# Altium PCB IMU_Breakout.PcbDoc
Units mm, origin at the board's own origin, x right, y up, seen from the top; angles counter-clockwise.
Board outline 95.12 x 95.12 mm, 2 copper layers (Top Layer, Bottom Layer); 8 components, 6 nets, 44 pads, 18 vias.
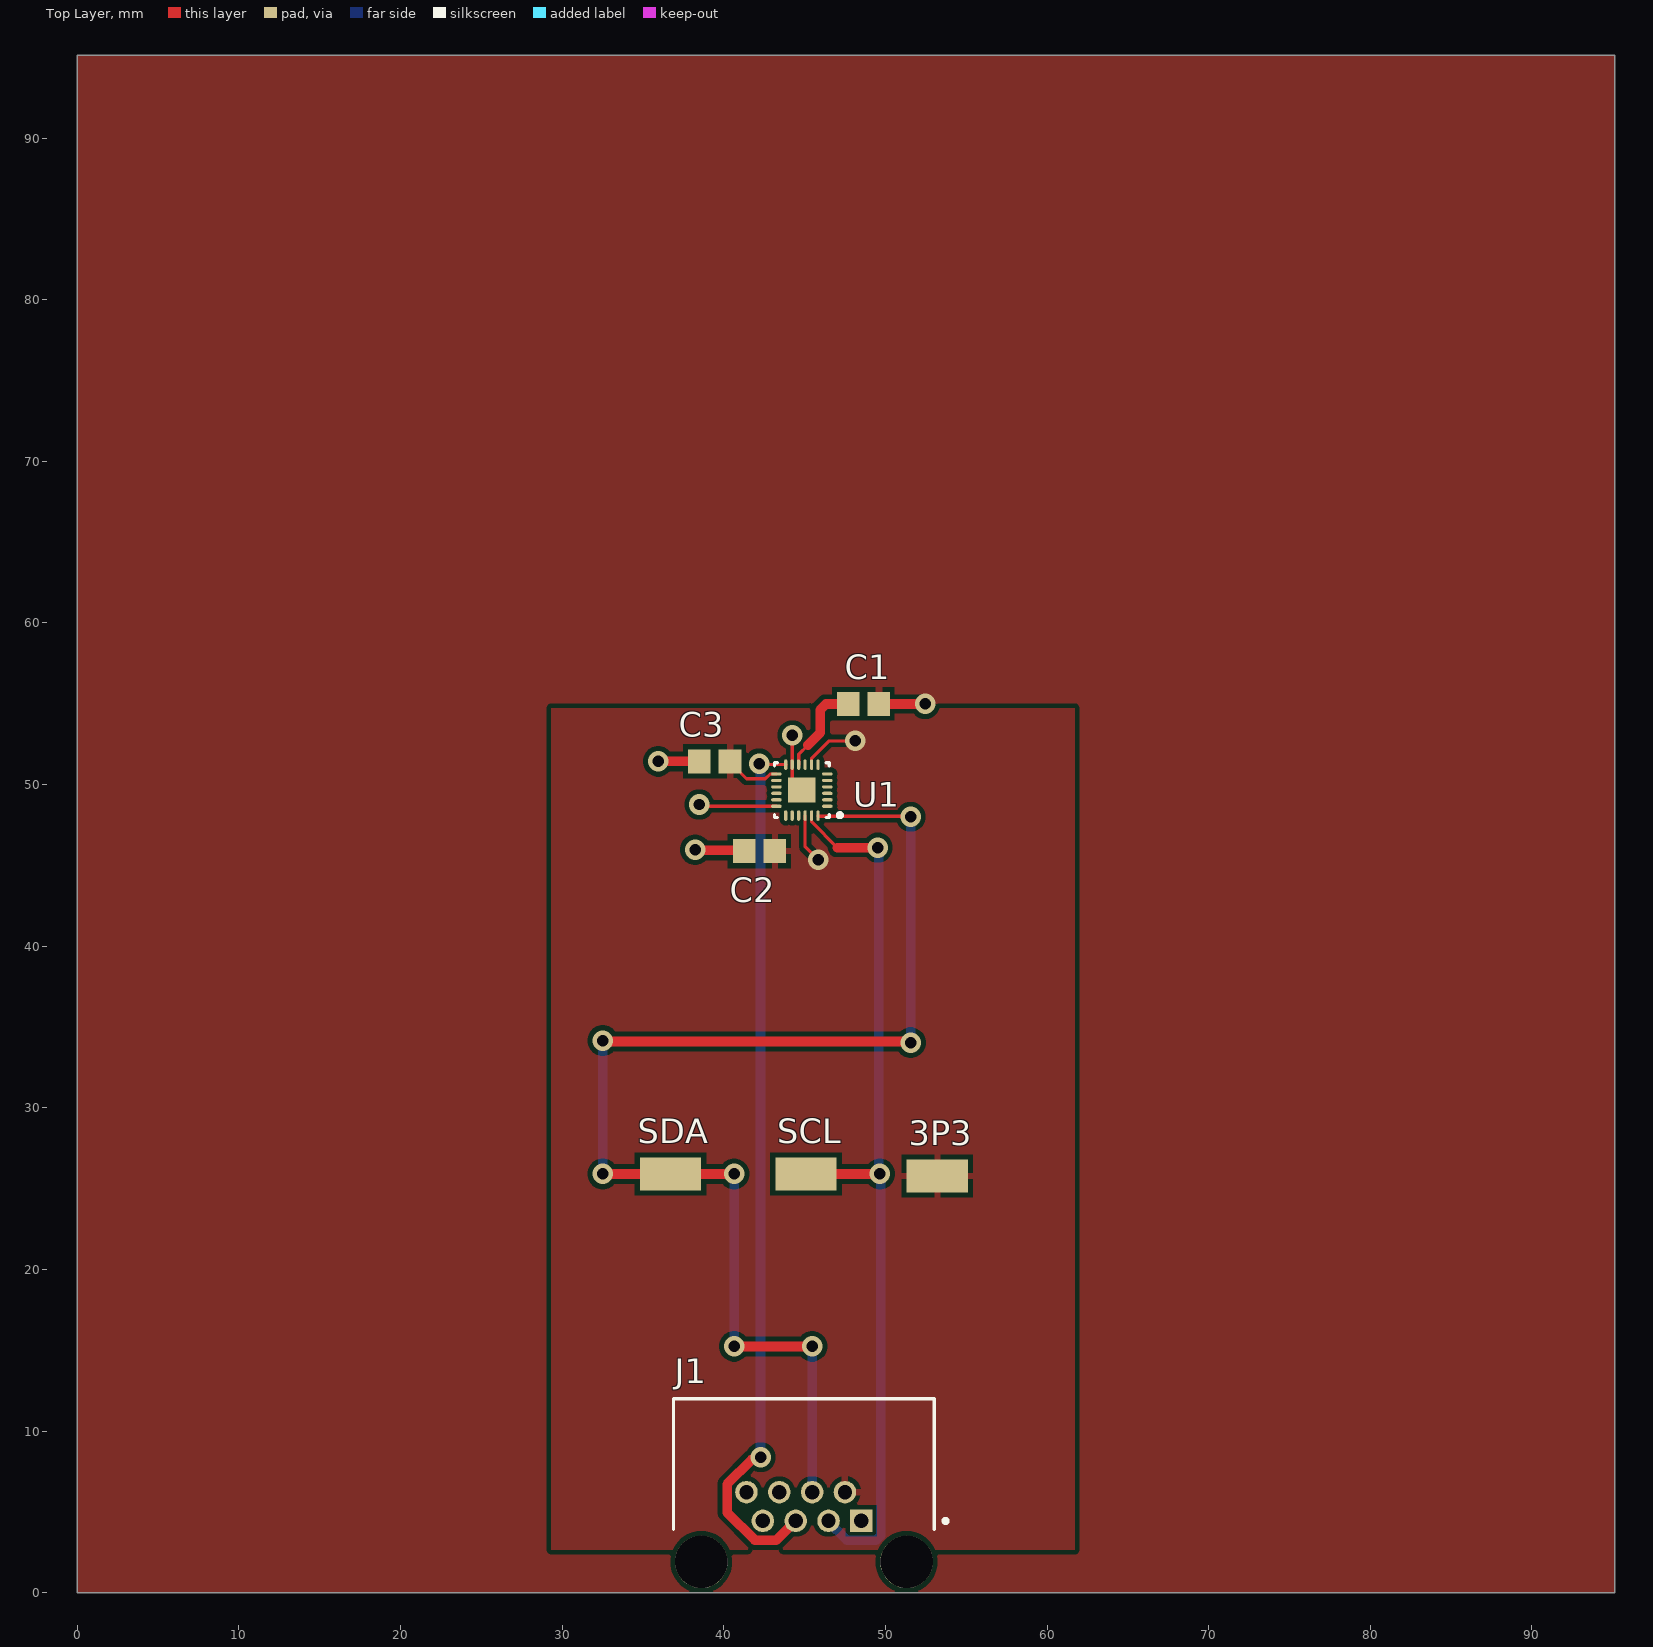
[diagram p0: Top Layer view]
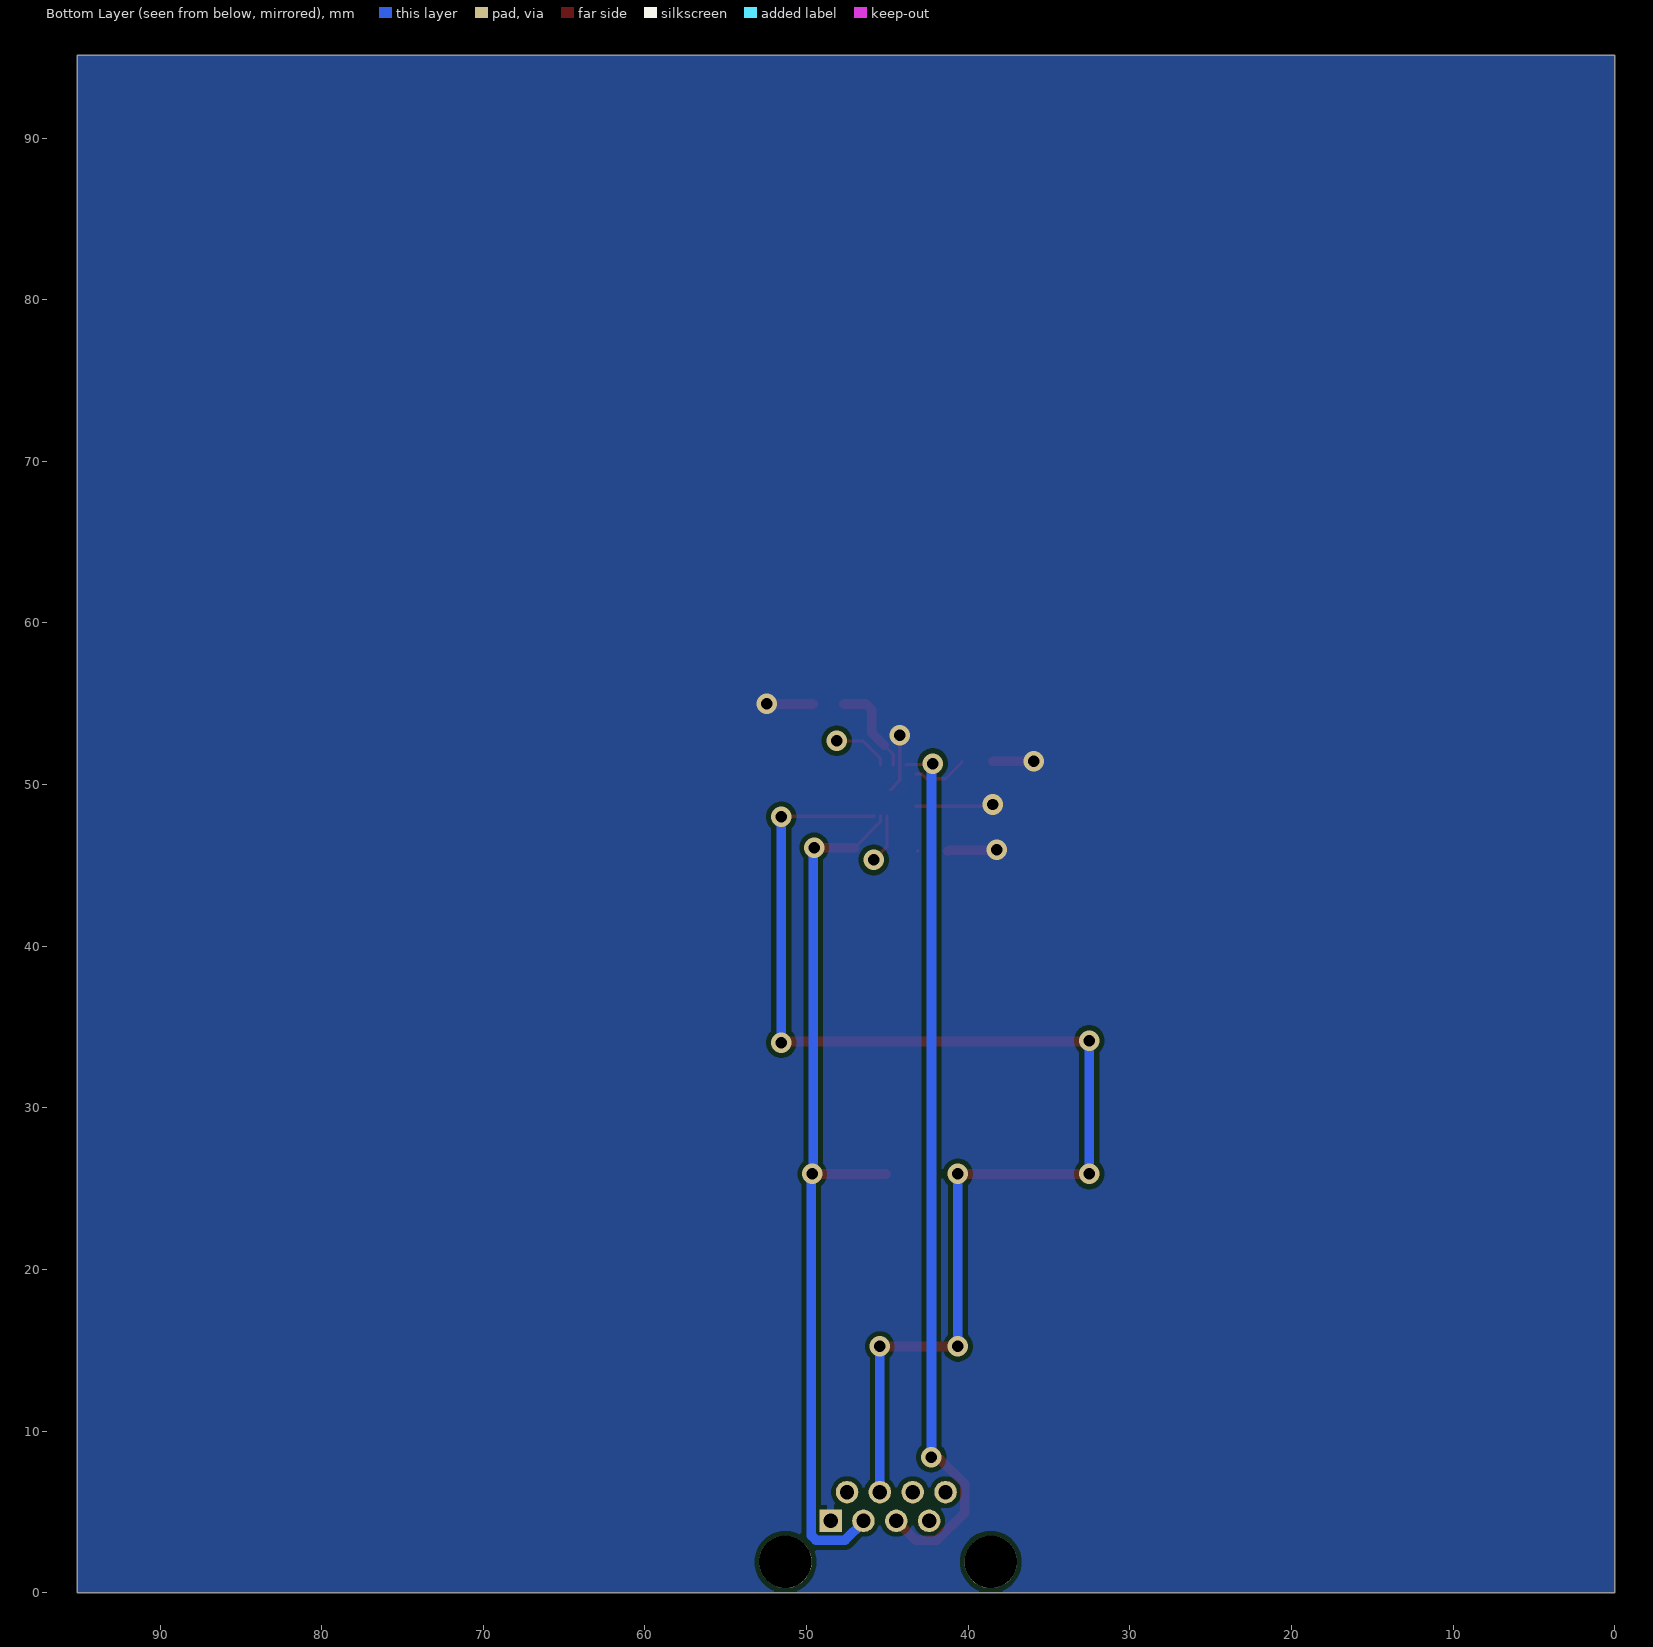
[diagram p1: Bottom Layer view, seen from below]

## Layer stack, top to bottom
Top Solder: solder mask 0.0102, Solder Resist, Dk 3.5
Top Layer: signal copper 0.0356
Dielectric 1: dielectric 0.32, FR-4, Dk 4.8
Bottom Layer: signal copper 0.0356
Bottom Solder: solder mask 0.0102, Solder Resist, Dk 3.5

## Board outline
0,0 0,95.123 95.123,95.123 95.123,0

## Design rules (kind name [scope] priority, off if disabled: settings)
Clearance Polygon_Clearance [All vs InPolygon] p1: gap=0.3 ignorepadtopadclearanceinfootprint=FALSE
Clearance [All] p2: gap=0.2 ignorepadtopadclearanceinfootprint=TRUE
ComponentClearance [InComponent('U3')] p1: gap=0 collisioncheckmode=3 verticalgap=0.254 showdistances=FALSE
Height [All] p1: minheight=0 maxheight=75 prefheight=12.7
HoleSize [All] p1: absolutevalues=TRUE maxlimit=6.35 minlimit=0.3 maxpercent=80.000 minpercent=20.000
MinimumAnnularRing [All] p1: minimumring=0.15
MinimumSolderMaskSliver [All] p1: minsoldermaskwidth=0.22
NetAntennae NetAntennae_5.0V [InNet('5.0V')] p1: netantennaetolerance=0
NetAntennae NetAntennae_3.3V [InNet('3.3V')] p2: netantennaetolerance=0
PlaneClearance [All] p1: clearance=0.3
PlaneConnect [All] p1: planeconnectstyle=Relief reliefexpansion=0.3 reliefentries=4 reliefconductorwidth=0.3 reliefairgap=0.3
PolygonConnect ViaConnect [All vs IsVia] p1: connectstyle=Direct reliefconductorwidth=0.381 reliefentries=4 polygonreliefangle="90 Angle" airgapwidth=0.254
PolygonConnect [All] p2: connectstyle=Relief reliefconductorwidth=0.4 reliefentries=4 polygonreliefangle="90 Angle" airgapwidth=0.3
RoutingVias [All] p1: holewidth=0.3 width=0.6 viastyle="Through Hole" minholewidth=0.3 minwidth=0.6 maxholewidth=5 maxwidth=10
SilkToSilkClearance [All] p1: silktosilkclearance=0
SilkToSolderMaskClearance [IsPad] p1: minsilkscreentomaskgap=0 clearancetoexposedcopper=TRUE
SolderMaskExpansion [All] p1: expansion=0.102 istentingtop=FALSE
UnConnectedPin [All] p1:
Width [All] p1: maxlimit=10 minlimit=0.2 preferedwidth=0.6
21 further rules are at their usual default settings.

## Classes and differential pairs
component class IMU: 3P3 C1 C2 C3 SCL SDA U1
component class Connectors: J1

## Components (designator, comment, footprint, x,y, rotation, side; value= is the part's Value field where it differs from the comment)
3P3 "5019" KSTN-5019_V 53.213,25.781 r0 top
C1 "GRM21BR71H104KA01L" CAPC2013X135X45ML10T25 48.641,54.991 r180 top
C2 "GRM21BR71H104KA01L" CAPC2013X135X45ML10T25 42.207,45.883 r0 top
C3 "GRM21BR71H104KA01L" CAPC2013X135X45ML10T25 39.436,51.435 r0 top
J1 "RJHSE-5080" FP-RJHSE-5080-MFG 44.958,4.318 r0 top
SCL "5019" KSTN-5019_V 45.085,25.908 r0 top (schematic designator TP1)
SDA "5019" KSTN-5019_V 36.703,25.908 r0 top (schematic designator TP2)
U1 "ICM-20948" TDK-QFN-24_L 44.831,49.657 r180 top

## Footprints (in the part's own frame and the unit in brackets; to place one, negate y for a bottom-side part, rotate by r counter-clockwise, add the part's x,y. Pads: shape width x height; smd on the part's side, far side on the other; paste and mask are expansions set on the pad)
CAPC2013X135X45ML10T25 [mm] "Chip Capacitor, 2-Leads, Body 2.10x1.35mm, IPC Low Density"
  rect 1.4x1.5 smd: 1(-0.95,0) 2(0.95,0)
  body extent -1.05,-0.67 1.05,0.67, height 1.35
FP-RJHSE-5080-MFG [mm]
  rect 1.39x1.39 hole 0.89 paste-2539.97 mask+0: 1(3.556,0.127)
  round 1.39 hole 0.89 paste-2539.97 mask+0: 2(2.54,1.905) 3(1.524,0.127) 4(0.508,1.905) 5(-0.508,0.127) 6(-1.524,1.905) 7(-2.54,0.127) 8(-3.556,1.905)
  round 3.25 hole 3.25 unplated paste-2539.97 mask+0: ""(-6.35,-2.413) ""(6.35,-2.413)
  silkscreen extent -8.06,-0.41 8.89,7.68, body extent -8.16,-7.78 8.16,7.78, height 0.25
KSTN-5019_V [mm] "Test Point, 1-Leads, Body 3.81x2.03mm"
  rect 3.8x2.03 smd: 1(0,0)
  body extent -1.9,-1.01 1.9,1.02, height 2.29
TDK-QFN-24_L [mm] "QFN, 24-Leads, Body 3.10x3.10mm, Pitch 0.40mm, Thermal Pad 1.70x1.54mm, IPC High Density"
  oval 0.65x0.2 smd: 1(-1.575,1) 2(-1.575,0.6) 3(-1.575,0.2) 4(-1.575,-0.2) 5(-1.575,-0.6) 6(-1.575,-1) 13(1.575,-1) 14(1.575,-0.6) 15(1.575,-0.2) 16(1.575,0.2) 17(1.575,0.6) 18(1.575,1)
  oval 0.2x0.65 smd: 7(-1,-1.575) 8(-0.6,-1.575) 9(-0.2,-1.575) 10(0.2,-1.575) 11(0.6,-1.575) 12(1,-1.575) 19(1,1.575) 20(0.6,1.575) 21(0.2,1.575) 22(-0.2,1.575) 23(-0.6,1.575) 24(-1,1.575)
  rect 1.7x1.54 smd: 25(0,0)
  silkscreen extent -2.48,-1.7 1.7,1.7, body extent -1.55,-1.55 1.55,1.55, height 1.05

## Part data
3P3 SCL SDA: library part CMP-1672-00008-1, "Test Point, 1 Position SMD, RoHS, Tape and Reel", Package Quantity=1000, ComponentLink1Description="Manufacturer URL", ComponentLink1URL=http://www.keyelco.com/, ComponentLink2Description=Datasheet, ComponentLink2URL=http://www.keyelco.com/product-pdf.cfm?p=1357, Contact Plating=Silver, DatasheetVersion=03/2014, Mount="Surface Mount", Mounting Technology="Surface Mount", PackageDescription="1-Pin Surface Mount Device, Body 3.81 x 2.03 mm", PackageReference=5019, Packaging="Tape and Reel", Pins=1, RoHSCompliant=True
C1 C2 C3: library part CMP-2100-03644-1, "Chip Capacitor, 0.1 uF, +/- 10%, 50 V, -55 to 125 degC, 0805 (2012 Metric), RoHS, Tape and Reel", Capacitance=100nF, Case Code (Imperial)=0805, Case Code (Metric)=2012, Dielectric=X7R, Dielectric Material=Ceramic, Insulation Resistance=10GR, Manufacturer=Murata, Max Operating Temperature=125degC, Min Operating Temperature=-55degC, Package Description="2-Pin Surface Mount Device, Body 2 x 1.25 mm", Package Quantity=1, Tolerance=10%, Voltage=50V, Case/Package=0805, Datasheet URL=http://psearch.en.murata.com/capacitor/product/GRM21BR71H104KA01%23.pdf, Datasheet Version=42675.0, Depth=1.25mm, Height=1.25mm, Lead Free=LeadFree, Length=2mm, Manufacturer URL=http://www.murata.com/, Material=Ceramic, Mount=SurfaceMount, Number of Pins=2, Package Reference=0805, Packaging=TapeandReel, Radiation Hardening=No, REACH SVHC=Unknown, RoHSCompliant=true, Termination=SMD/SMT, Thickness=0.053inch, Voltage Rating=50V, Voltage Rating (DC)=50V, Width=0.049inch
J1: library part CMP-02366-000003-1, "CONN MOD JACK 8P8C R/A UNSHLD", Current Rating=1.5A, Manufacturer=Amphenol, Package=CONN_MOD_JACK, Temperature="-55°C to +85°C", Temperature Range High=+85°C, Temperature Range Low=-55°C, Voltage Rating=125V, Automotive=No, Category=Conn, ComponentLink2Description=Datasheet, ComponentLink2URL=https://cdn.amphenol-icc.com/media/wysiwyg/files/documentation/datasheet/inputoutput/io-modjack-rjhse.pdf, Conn Gender=Female, Conn Orientation="Right Angle", Contact Material=Gold,Nickel, Device Class L1=Connectors, Device Class L2="Modular / Ethernet Connectors", Device Class L3=unset, Digikey Description="CONN MOD JACK 8P8C R/A UNSHLD", Footprint Url=https://cdn.amphenol-icc.com/media/wysiwyg/files/drawing/rjhse5080.pdf?__cf_chl_jschl_tk__=e349db0bbbb6188a39347cd5e541b92fa02c9719-1587748343-0-AW7tChdeHzRPLX9gSWj7WrKaXQoY9BsmT9Ek0h-T62M9y3Rs9iypFcOtkzb-6sGYQEjFE-jcoNciDETCOZrh1rYyOesac5SvYLoLwHIsHvF4AKBlx-MXmfZUVk9OTTJLqyQq2qMm0PFRLJpNcK0nrKResqOniRSYixG2sPTmOPraH-ULJFBDL602CHqcI9KKBgTq90Jh1OL2Td4moJ99rFsJRJ1Tk_uoxGe8ublcP_ARu-uLpWcQrBcwOcHDTAwL29DAwVaqcH7ta8Ks7WMlHmVl_pILeEDwT0bE9vu5Pa5S3PtNRF1leuFkgi_FMbUxTDulc5xzbXSfng8srUIV1lWXny5nx1fZJEUa_w97yKjffzBMxiWLWVN-V7-uqAaPbyv_m-wRyw5O25OZNyJOeGU, Height=0.535inch, Is Female=yes, Lead Free=Yes, Manufacturer Part Number=RJHSE-5080, Mouser Description="Modular Connectors / Ethernet Connectors R/A RJ45 NONSHIELDED 8 CONT NO LEDS", Number of Contacts=8, Octopart=https://octopart.com/rjhse-5080-amphenol-45060, Pitch=1.02mm, RoHS=TRUE
U1: library part CMP-2000-07532-1, "World’s Lowest Power 9-Axis MEMS MotionTracking(TM) Device, 1.71 to 3.6 V, -40 to 85 degC, 24-Pin QFN, RoHS, Tape and Reel", Manufacturer=TDK, Package Description="24-Pin Quad Flat No-lead Package, Body 3 x 3 mm, Pitch 0.4 mm", Package Reference=QFN-24, Datasheet URL=https://www.invensense.com/wp-content/uploads/2016/06/DS-000189-ICM-20948-v1.3.pdf, Datasheet Version="Rev. 1.3, 06/2017", Manufacturer URL=http://www.tdk.com/, Mounting Technology=SurfaceMount

## Via types
v1: diameter 1.27, hole 0.711, Top Layer to Bottom Layer, 18 vias

## Nets (pads, with @x,y where several pads share a name; then routed paths per layer and width w, separated by ;. In a path a pad name is that pad's centre, name@x,y a point inside that pad or via, vN(x,y) a via of type N, cw(c..) or ccw(c..) an arc to the next point about the centre after c; other vN are vias at no path point)
3P3: 3P3.1 C2.2 C3.2 J1.2 U1.8 U1.13 U1.22 | length 10.1
  Top Layer w0.2: C3.2 40.386,51.385 41.404,50.367 42.575,50.367 42.865,50.657 U1.13 ; C2.2@43.126,45.914 C2.2 ; U1.22 45.031,46.155 v1(45.847,45.339) ; U1.8 45.431,51.623 46.513,52.705 v1(48.133,52.705)
GND: C1.1 C2.1 C3.1 J1.1 U1.11 U1.18 U1.25 | length 16.9
  Top Layer w0.2: v1(38.481,48.768) 38.592,48.657 U1.18 ; v1(44.25,53.053) 44.231,53.034 U1.11 44.231,50.257 U1.25
  Top Layer w0.6: v1(35.941,51.435) C3.1 ; v1(38.227,45.974) 38.272,45.929 41.211,45.929 C2.1 ; C1.1 v1(52.451,54.991)
IMU_INT: J1.5 U1.12 | length 54.6
  Top Layer w0.2: v1(42.188,51.302) 42.253,51.238 43.831,51.238 U1.12
  Top Layer w0.6: v1(42.291,8.382) 42.163,8.254 41.743,8.254 40.207,6.718 40.207,4.966 41.923,3.25 43.255,3.25 J1.5
  Bottom Layer w0.6: v1(42.188,51.302) 42.269,51.221 42.269,8.404 v1(42.291,8.382)
IMU_Regout: C1.2 U1.10 | length 6
  Top Layer w0.2: U1.10 44.631,51.87 45.212,52.451 ; C1.2 C1.2@47.806,54.876
  Top Layer w0.6: 45.212,52.451 45.974,53.213 45.974,54.64 46.325,54.991 C1.2
SCL: J1.3 SCL.1 U1.23 | length 56.2
  Top Layer w0.2: U1.23 45.431,47.691 47.021,46.101
  Top Layer w0.6: SCL.1 v1(49.657,25.908) ; 47.021,46.101 v1(49.53,46.101)
  Bottom Layer w0.6: J1.3 46.482,4.38 47.612,3.25 49.416,3.25 49.709,3.543 49.709,25.856 v1(49.657,25.908) 49.593,25.971 49.593,46.038 v1(49.53,46.101)
SDA: J1.4 SDA.1 U1.24 | length 79.8
  Top Layer w0.2: U1.24 45.831,48.044 51.524,48.044 v1(51.562,48.006)
  Top Layer w0.6: v1(32.512,25.908) SDA.1 v1(40.64,25.908) ; v1(32.512,34.163) 32.575,34.099 51.498,34.099 v1(51.562,34.036) ; v1(40.64,15.24) v1(45.466,15.24)
  Bottom Layer w0.6: v1(32.512,25.908) v1(32.512,34.163) ; v1(40.64,15.24) v1(40.64,25.908) ; J1.4 v1(45.466,15.24) ; v1(51.562,34.036) v1(51.562,48.006)
pads on no net: J1. J1.6 J1.7 J1.8 U1.1 U1.2 U1.3 U1.4 U1.5 U1.6 U1.7 U1.9 U1.14 U1.15 U1.16 U1.17 U1.19 U1.20 U1.21

## Polygon pours and split planes (outlines as drawn)
GND on Top Layer (solid, pour order 1): 0,95.123 95.123,95.123 95.123,0.127 94.996,0 0,0
3P3 on Top Layer (solid, pour order 0): 29.337,54.737 29.337,2.667 61.722,2.667 61.722,54.737
GND on Bottom Layer (solid, pour order 2): 95.123,0 0,0 0,95.123 94.996,95.123 95.123,95.123

## Silkscreen, mask and mechanical layers (free items; w line width, h text height)
Mechanical 13:
  the board outline again, w0.254